# Altium PCB Blaster.PcbDoc
Units mm, origin at the board's own origin, x right, y up, seen from the top; angles counter-clockwise.
Board outline 45.95 x 23.95 mm, 2 copper layers (Top Layer, Bottom Layer); 22 components, 33 nets, 129 pads, 49 vias.
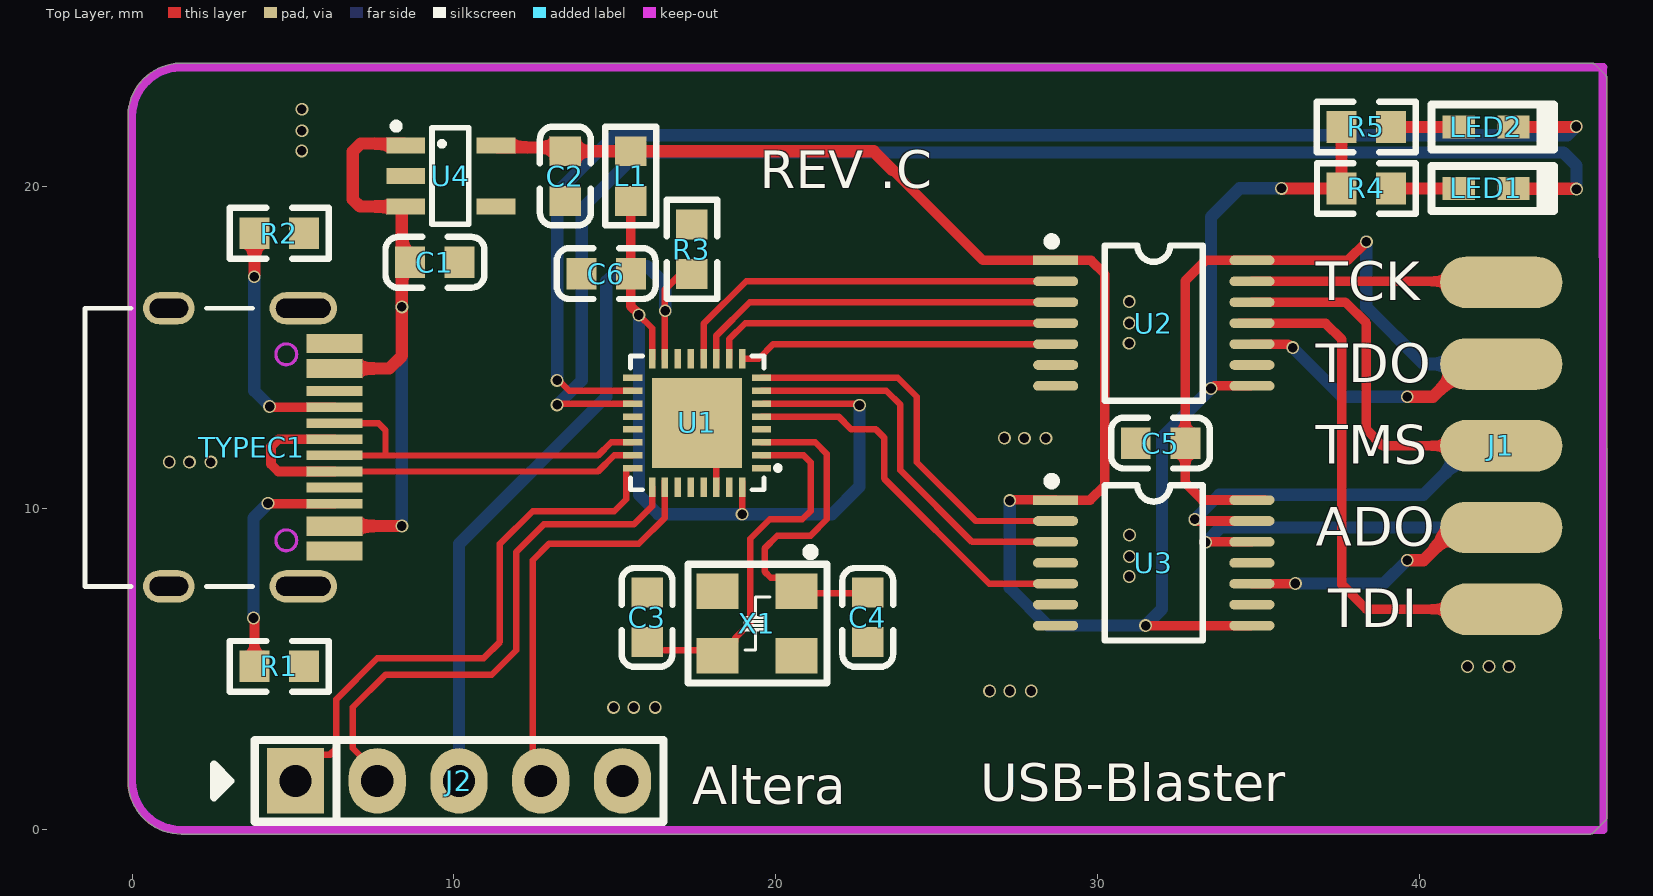
[diagram p0: Top Layer view]
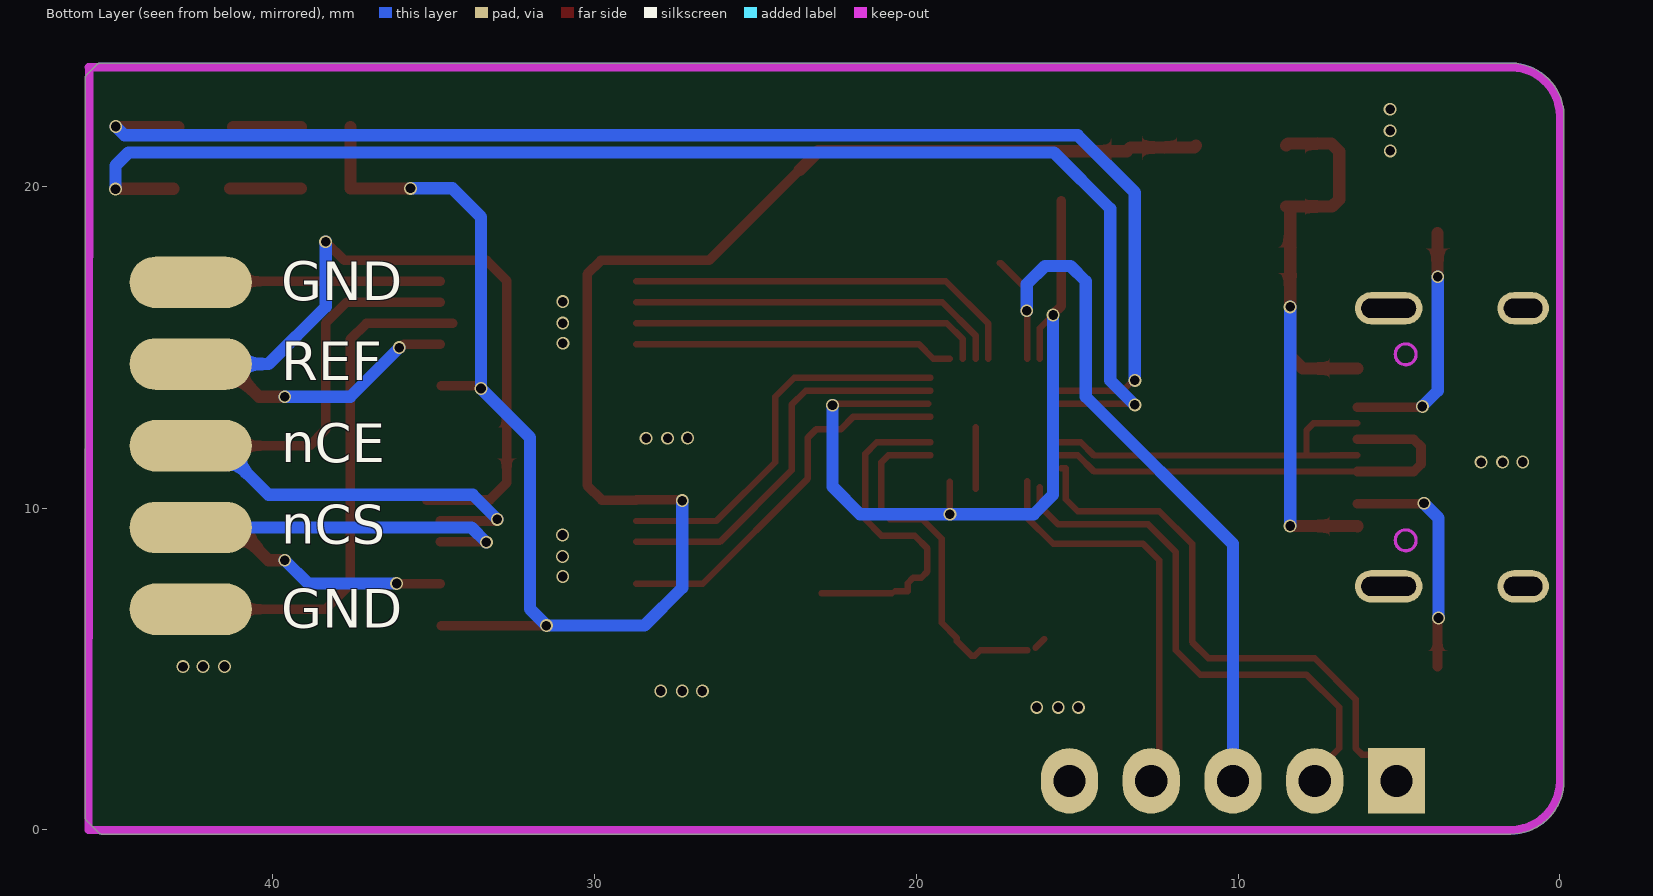
[diagram p1: Bottom Layer view, seen from below]
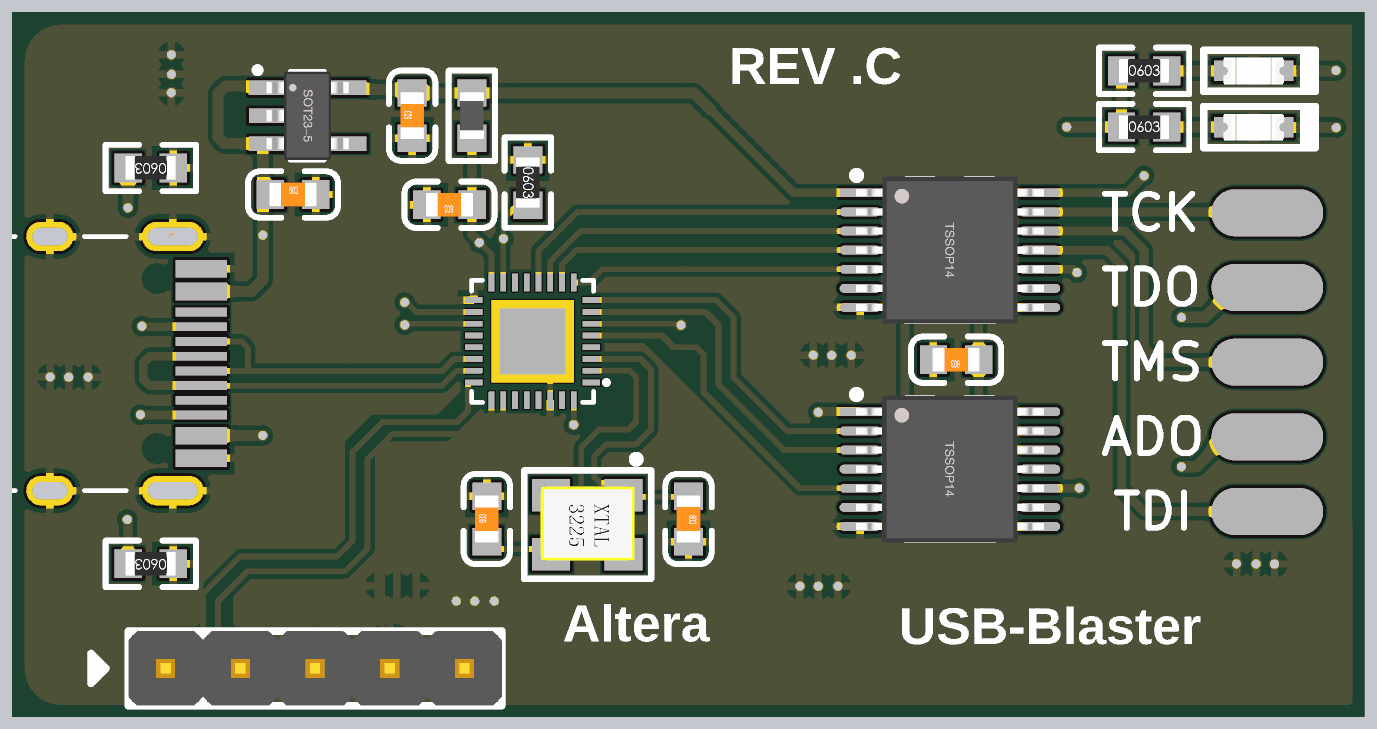
[diagram p2: 3D render of the assembled board from above, using the file's embedded part models]

## Layer stack, top to bottom
Top Solder: solder mask 0.0102, Solder Resist, Dk 3.5
Top Layer: signal copper 0.0356
Dielectric 1: dielectric 0.32, FR-4, Dk 4.8
Bottom Layer: signal copper 0.0356
Bottom Solder: solder mask 0.0102, Solder Resist, Dk 3.5

## Board outline
-0.127,1.524 -0.127,22.303 cw(c0,22.303) -0.118,22.351 cw(c1.524,22.176) 1.349,23.818 cw(c1.397,23.7) 1.397,23.827 45.368,23.827 cw(c45.368,23.7) 45.458,23.79 45.79,23.458 45.79,23.459 cw(c45.7,23.368) 45.827,23.368 45.827,0.381 cw(c45.7,0.381) 45.79,0.29 45.79,0.291 45.409,-0.09 45.41,-0.09 cw(c45.319,0) 45.319,-0.127 1.524,-0.127 cw(c1.524,1.524)

## Design rules (kind name [scope] priority, off if disabled: settings)
Clearance [All] p1: gap=0.15 ignorepadtopadclearanceinfootprint=FALSE
PolygonConnect [All] p1: connectstyle=Relief reliefconductorwidth=0.254 reliefentries=4 polygonreliefangle="90 Angle" airgapwidth=0.254
RoutingVias [All] p1: holewidth=0.711 width=1.27 viastyle="Through Hole" minholewidth=0.3 minwidth=0.4 maxholewidth=0.711 maxwidth=1.27
SolderMaskExpansion [All] p1: expansion=0.102 istentingtop=FALSE
SupplyNets "Schematic Supply Nets_3" [InNet('+5')] p1: voltage=0.000
SupplyNets "Schematic Supply Nets_2" [InNet('+3.3')] p2: voltage=0.000
SupplyNets "Schematic Supply Nets_1" [InNet('GND')] p3: voltage=0.000
SupplyNets "Schematic Supply Nets" [InNet('VREF')] p4: voltage=0.000
Width [All] p1: maxlimit=0.762 minlimit=0.2 preferedwidth=0.381
30 further rules are at their usual default settings.

## Components (designator, comment, footprint, x,y, rotation, side; value= is the part's Value field where it differs from the comment)
C1 "1uF" LC-0603_C 9.41,17.64 r0 top
C2 "1uF" LC-0603_C 13.462,20.32 r90 top
C3 "20pF" LC-0603_C 16.002,6.604 r90 top
C4 "20pF" LC-0603_C 22.86,6.604 r270 top
C5 "1uF" LC-0603_C 31.959,12.021 r180 top
C6 "1uF" LC-0603_C 14.731,17.29 r180 top
J1 "HDR2x5" HDR-M-2.54_2X5_SMT 42.545,11.938 r0 top locked
J2 "HDR1x5" PIN-5-2.54-1.0 10.16,1.524 r0 top
L1 "BLM21PG121SN1D" LC-0603_L 15.494,20.32 r270 top
LED1 "LED-A" LED-0603 42.076,19.933 r0 top
LED2 "LED-B" LED-0603 42.076,21.844 r0 top
R1 "5.1K" LC-0603_R 4.572,5.08 r180 top
R2 "5.1K" LC-0603_R 4.572,18.542 r180 top
R3 "5.1K" LC-0603_R 17.397,18.045 r270 top
R4 "1K" LC-0603_R 38.355,19.933 r0 top
R5 "1K" LC-0603_R 38.354,21.844 r0 top
TYPEC1 "TYPEC16P-SMD" TYPE-C-Receptacle-2.0 -1.459,11.89 r270 top locked
U1 "AGRV2KQ32" QFN-32_L4.0-W4.0-P0.40-BL-EP2.7 17.558,12.646 r90 top
U2 "TXU0304" TSSOP14_N 31.75,15.748 r0 top
U3 "TXU0304" TSSOP14_N 31.748,8.3 r0 top
U4 "LP5907" SOT23-5N 9.906,20.32 r270 top
X1 "XTAL-3225" XTAL-3225 20.574,7.366 r270 top

## Footprints (in the part's own frame and the unit in brackets; to place one, negate y for a bottom-side part, rotate by r counter-clockwise, add the part's x,y. Pads: shape width x height; smd on the part's side, far side on the other; paste and mask are expansions set on the pad)
HDR-M-2.54_2X5_SMT [mm] "Pin Header"
  oval 3.8x1.6 smd: 1(0,5.08) 3(0,2.54) 5(0,0) 7(0,-2.54) 9(0,-5.08)
  oval 3.8x1.6 smd far side: 2(0,5.08) 4(0,2.54) 6(0,0) 8(0,-2.54) 10(0,-5.08)
LC-0603_C [mm]
  rect 0.93x0.98 smd: 1(-0.77,0) 2(0.77,0)
  silkscreen extent -1.53,-0.79 1.54,0.79, body extent -0.8,-0.4 0.8,0.4, height 0.3
LC-0603_L [mm]
  rect 0.93x0.98 smd: 1(-0.77,0) 2(0.77,0)
  silkscreen extent -1.53,-0.79 1.54,0.79, body extent -0.82,-0.41 0.83,0.41, height 0.46
LC-0603_R [mm]
  rect 0.93x0.98 smd: 1(-0.77,0) 2(0.77,0)
  silkscreen extent -1.53,-0.79 1.54,0.79, body extent -0.85,-0.4 0.85,0.4, height 0.56
LED-0603 [mm] "LED, SMD, 0603"
  rect 1x0.7 smd: 1(-0.85,0) 2(0.85,0)
  silkscreen extent -1.7,-0.7 2.1,0.7, body extent -1.03,-0.46 1.03,0.45, height 0.85
PIN-5-2.54-1.0 [mil] "Pin Header"
  rect 70x80 hole 39.37: 1(-200,0)
  oval 70x80 hole 39.37: 2(-100,0) 3(0,0) 4(100,0) 5(200,0)
  silkscreen extent -300,-50 250,50, body extent -250,-50 250,50, height 398
QFN-32_L4.0-W4.0-P0.40-BL-EP2.7 [mm]
  rect 0.2x0.6 smd paste-100 mask+0.051: 1(-1.4,-2) 2(-1,-2) 3(-0.6,-2) 4(-0.2,-2) 5(0.2,-2) 6(0.6,-2) 7(1,-2) 8(1.4,-2) 17(1.4,2) 18(1,2) 19(0.6,2) 20(0.2,2) 21(-0.2,2) 22(-0.6,2) 23(-1,2) 24(-1.4,2)
  rect 0.6x0.2 smd paste-100 mask+0.051: 9(2,-1.4) 10(2,-1) 11(2,-0.6) 12(2,-0.2) 13(2,0.2) 14(2,0.6) 15(2,1) 16(2,1.4) 25(-2,1.4) 26(-2,1) 27(-2,0.6) 28(-2,0.2) 29(-2,-0.2) 30(-2,-0.6) 31(-2,-1) 32(-2,-1.4)
  rect 2.8x2.8 smd paste-100 mask+0.051: 33(0,0)
  silkscreen extent -2.08,-2.58 2.08,2.08
SOT23-5N [mm] "3x1.6x1.1mm(长宽高)"
  rect 0.5x1.2 smd: 1(-0.95,-1.4) 2(0,-1.4) 3(0.95,-1.4) 4(0.95,1.4) 5(-0.95,1.4)
  silkscreen extent -1.63,-1.78 1.5,0.56, body extent -1.5,-1.4 1.5,1.4, height 1.15
TSSOP14_N [mm] "5*6.4*1mm（长宽高）"
  rect 1.4x0.3 smd: 1(-3.05,1.95)
  oval 1.4x0.3 smd: 2(-3.05,1.3) 3(-3.05,0.65) 4(-3.05,0) 5(-3.05,-0.65) 6(-3.05,-1.3) 7(-3.05,-1.95) 8(3.05,-1.95) 9(3.05,-1.3) 10(3.05,-0.65) 11(3.05,0) 12(3.05,0.65) 13(3.05,1.3) 14(3.05,1.95)
  silkscreen extent -3.3,-2.41 1.52,2.67, body extent -3.2,-2.5 3.2,2.5, height 1.03
TYPE-C-Receptacle-2.0 [mm]
  oval 1x2.1 hole 0.6 slot 1.7 at 90 deg: 0(-4.32,6.78) 0(4.32,6.78)
  oval 1x1.6 hole 0.6 slot 1.2 at 90 deg: 0(-4.32,2.6) 0(4.32,2.6)
  rect 0.6x1.75 smd: A1(-3.225,7.75) A4(-2.45,7.75) B1(3.225,7.75) B4(2.45,7.75)
  rect 0.3x1.75 smd: A5(-1.25,7.75) A6(-0.25,7.75) A7(0.25,7.75) A8(1.25,7.75) B5(1.75,7.75) B6(0.75,7.75) B7(-0.75,7.75) B8(-1.75,7.75)
  Keep-Out Layer circle w0.1: c-2.89,6.25 r0.325
  Keep-Out Layer circle w0.1: c2.89,6.25 r0.325
  silkscreen extent -4.32,0 4.32,5.2
XTAL-3225 [mm]
  rect 1.1x1.3 smd: 1(-0.051,0.076) 2(-0.051,-2.388) 3(1.956,-2.388) 4(1.956,0.076)
  silkscreen extent -1.4,-3.3 2.79,1.02, body extent -0.34,-2.74 2.16,0.46, height 0.8

## Part data
C1 C2 C3 C4 C5 C6: library part CAP, "Capacitor"
J1 J2: "Connector"
L1: library part INDUCTANCE, "Inductance"
LED1: library part LED
LED2: library part LED, "LED"
R1 R4 R5: library part RES, "Resistor"
R2 R3: library part RES
U4: library part LP5907MFX-3.3/NOPB, Symbol=LP5907MFX-3.3/NOPB
X1: library part XTAL-4P, Symbol=XL2EL89CSI-KPIYLC-8M
U1: Symbol=AGRV2KQ32
U2 U3: Symbol=GTXU0304TD

## Via types
v1: diameter 0.4, hole 0.3, Top Layer to Bottom Layer, tented both sides, 49 vias

## Nets (pads, with @x,y where several pads share a name; then routed paths per layer and width w, separated by ;. In a path a pad name is that pad's centre, name@x,y a point inside that pad or via, vN(x,y) a via of type N, cw(c..) or ccw(c..) an arc to the next point about the centre after c; other vN are vias at no path point)
+3.3: C2.2 L1.1 R4.1 R5.1 U2.1 U2.8 U3.1 U3.8 U4.5 | length 62.1
  Top Layer w0.3: 23.622,20.511 26.435,17.698 U2.1 29.8,17.698 30.226,17.272 30.226,10.71 29.766,10.25 U3.1 ; v1@27.266,10.255 U3.1@28.703,10.255 ; v1(31.496,6.35) U3.8@34.757,6.35 ; v1(33.528,13.716) 33.555,13.716 33.637,13.798 U2.8@34.76,13.798
  Top Layer w0.381: U4.5 11.365,21.211 13.341,21.211 C2.2 15.232,21.09 23.043,21.09 23.622,20.511 ; v1@35.759,19.922 35.77,19.933 R4.1 ; R4.1@37.585,19.934 R5.1
  Bottom Layer w0.381: v1(27.273,10.233) 27.273,7.525 28.448,6.35 v1(31.496,6.35) 31.496,6.355 32.004,6.863 32.004,12.192 v1(33.528,13.716) 33.528,19.05 34.415,19.937 v1(35.719,19.937)
+5: C1.1 TYPEC1.A4 TYPEC1.B4 U4.1 U4.3 | length 20.8
  Top Layer w0.381: TYPEC1.B4 6.293,9.442 8.379,9.442 v1(8.381,9.445) ; TYPEC1.A4 7.99,14.34 8.382,14.732 8.382,19.31 U4.3@8.441,19.37 ; U4.3 U4.3@8.441,19.37 ; U4.1 8.447,21.329 7.105,21.329 6.858,21.082 6.858,19.593 7.081,19.37 U4.3@8.441,19.37
  Bottom Layer w0.381: v1(8.381,9.445) v1(8.382,16.256)
ASDO: J1.7 U3.10 | length 8.5
  Top Layer w0.3: U3.10 36.144,7.65 v1(36.149,7.656)
  Top Layer w0.381: v1(39.624,8.382) 40.132,8.382 40.962,9.212 42.359,9.212 J1.7
  Bottom Layer w0.381: v1(36.149,7.656) 38.898,7.656 v1(39.624,8.382)
BOOT0: J2.3 R3.2 U1.15 | length 22.9
  Top Layer w0.2: U1.15 16.558,16.795 17.38,17.617 R3.2@17.405,17.617
  Bottom Layer w0.381: J2.3@10.16,2.453 10.16,8.89 14.732,13.462 14.732,17.049 15.209,17.526 16.002,17.526 16.566,16.962 v1(16.566,16.135)
DN: TYPEC1.A7 TYPEC1.B7 U1.22 | length 11.9
  Top Layer w0.2: TYPEC1.B7 7.658,12.64 7.874,12.424 7.874,11.635 ; TYPEC1.A7@6.296,11.64 7.104,11.64 7.108,11.635 7.874,11.635 ; U1.22 14.888,12.046 14.478,11.635 7.874,11.635
DP: TYPEC1.A6 TYPEC1.B6 U1.23 | length 14.2
  Top Layer w0.2: TYPEC1.B6@6.293,11.138 14.475,11.138 14.983,11.646 U1.23
  Top Layer w0.3: TYPEC1.B6 4.541,11.14 4.318,11.363 4.318,11.917 4.541,12.14 TYPEC1.A6
GND: C1.2 C2.1 C3.2 C4.2 C5.2 C6.2 J1.2 J1.10 J2.5 R1.1 R2.1 R3.1 TYPEC1.0 TYPEC1.A1 TYPEC1.B1 U1.17 U1.30 U1.33 U2.7 U3.7 U4.2 | length 1.9
  Top Layer w0.2: U1.30@18.158,10.597 U1.33@18.158,12.514
  other v1: 14.964,3.81 15.588,3.81 16.256,3.81 26.648,4.318 27.272,4.318 27.94,4.318 41.496,5.08 42.164,5.08 42.788,5.075 30.988,7.874 30.993,8.498 30.993,9.166 1.154,11.435 1.778,11.43 2.446,11.43 27.104,12.178 27.728,12.172 28.396,12.172 30.983,15.124 30.988,15.748 30.988,16.416 5.271,21.102 5.276,21.726 5.276,22.394
IO-ASDO: U1.5 U3.5 | length 12
  Top Layer w0.2: U1.5 21.952,12.846 22.352,12.446 23.114,12.446 23.368,12.192 23.368,10.922 26.64,7.65 U3.5
IO-NCE: U1.8 U3.2 | length 12.2
  Top Layer w0.2: U1.8 20.675,14.046 20.678,14.049 23.797,14.049 24.384,13.462 24.384,11.43 26.214,9.6 U3.2
IO-NCS: U1.7 U3.3 | length 12.3
  Top Layer w0.2: U1.7 20.831,13.646 23.438,13.646 23.876,13.208 23.876,11.176 26.102,8.95 U3.3
IO-TCK: U1.12 U2.2 | length 12.6
  Top Layer w0.2: U1.12 17.758,15.726 19.08,17.048 U2.2
IO-TDI: U1.10 U2.4 | length 11
  Top Layer w0.2: U1.10 18.558,15.256 19.05,15.748 U2.4
IO-TDO: U1.9 U2.5 | length 9.9
  Top Layer w0.2: U1.9 19.472,14.646 19.924,15.098 U2.5
IO-TMS: U1.11 U2.3 | length 11.7
  Top Layer w0.2: U1.11 18.158,15.364 19.192,16.398 U2.3
JTCK: J2.2 U1.25 | length 16.6
  Top Layer w0.2: J2.2@7.62,1.778 6.858,2.54 6.858,3.81 7.874,4.826 11.176,4.826 11.938,5.588 11.938,8.636 12.795,9.493 15.589,9.493 16.158,10.062 U1.25
JTMS: J2.1 U1.24 | length 17.7
  Top Layer w0.2: J2.1 5.08,1.553 5.869,2.342 6.152,2.342 6.35,2.54 6.35,4.064 7.62,5.334 10.922,5.334 11.43,5.842 11.43,8.89 12.446,9.906 14.986,9.906 15.358,10.278 15.358,11.246 U1.24@15.494,11.246
LED1: LED1.2 U1.19 | length 43.1
  Top Layer w0.2: v1(13.208,13.208) 13.246,13.246 U1.19
  Top Layer w0.381: LED1.2@43.082,19.922 44.871,19.922 44.878,19.914 v1(44.883,19.914)
  Bottom Layer w0.381: v1(13.208,13.208) 13.21,13.208 13.97,13.968 13.97,19.304 15.718,21.052 44.48,21.052 44.883,20.649 v1(44.883,19.914)
LED2: LED2.2 U1.18 | length 42.8
  Top Layer w0.2: v1(13.208,13.97) 13.262,13.97 13.586,13.646 U1.18
  Top Layer w0.381: LED2.2 44.857,21.844 44.872,21.859 v1(44.877,21.859)
  Bottom Layer w0.381: v1(13.208,13.97) 13.208,19.812 14.986,21.59 44.608,21.59 v1(44.877,21.859)
MCU3V3: C6.1 L1.2 U1.6 U1.16 U1.32 | length 24.8
  Top Layer w0.2: v1(15.748,16.002) 16.159,15.591 U1.16@16.159,14.905 ; U1.16 U1.16@16.158,14.904 ; v1(18.955,9.812) U1.32@18.956,10.824 ; U1.6@19.634,13.246 22.502,13.246 22.552,13.196 v1(22.606,13.196)
  Top Layer w0.3: L1.2 15.494,16.283 15.748,16.029 v1(15.748,16.002)
  Bottom Layer w0.381: v1(15.748,16.002) 15.748,10.414 16.35,9.812 v1(18.955,9.812) 21.75,9.812 22.606,10.668 v1(22.606,13.196)
nCE: J1.6 U3.13 | length 12.3
  Top Layer w0.3: v1(33.02,9.652) 33.047,9.652 33.099,9.6 U3.13
  Bottom Layer w0.381: v1(33.02,9.652) 33.782,10.414 40.132,10.414 41.656,11.938 J1.6
nCS: J1.8 U3.12 | length 10.8
  Top Layer w0.3: v1@33.361,8.95 U3.12
  Bottom Layer w0.381: v1(33.361,8.938) 33.821,9.398 J1.8
NetC3_1: C3.1 U1.2 X1.3 | length 11.6
  Top Layer w0.2: C3.1@16.021,5.933 C3.1@16.296,5.658 ; 16.544,5.588 18.009,5.588 X1.3 18.286,5.41 18.736,5.86 18.736,5.96 19.211,6.435 19.211,9.051 19.812,9.652 20.828,9.652 21.082,9.906 21.082,11.43 20.866,11.646 U1.2
NetC4_1: C4.1 U1.3 X1.1 | length 10.8
  Top Layer w0.2: U1.3 21.228,12.046 21.59,11.684 21.59,9.652 21.082,9.144 20.052,9.144 19.654,8.746 19.654,8.032 19.848,7.838 20.1,7.838 20.269,7.669 20.269,7.417 X1.1 ; X1.1@20.759,7.36 C4.1@22.945,7.36
NetLED1_1: LED1.1 R4.2 | length 2.2
  Top Layer w0.381: R4.2 LED1.1@41.315,19.933
NetLED2_1: LED2.1 R5.2 | length 2.1
  Top Layer w0.381: R5.2 LED2.1
NetR1_2: R1.2 TYPEC1.B5 | length 7.3
  Top Layer w0.3: R1.2 v1@3.802,6.604 ; v1@4.237,10.136 5.474,10.136 5.478,10.14 TYPEC1.B5@6.287,10.14
  Bottom Layer w0.381: v1(3.773,6.587) 3.773,9.697 4.222,10.146 v1(4.222,10.151)
NetR2_2: R2.2 TYPEC1.A5 | length 7.5
  Top Layer w0.3: v1(4.275,13.16) 4.302,13.16 4.322,13.14 TYPEC1.A5
  Top Layer w0.381: v1@3.802,17.28 R2.2
  Bottom Layer w0.381: v1(3.794,17.191) 3.794,13.646 4.275,13.165 v1(4.275,13.16)
TCK: J1.1 U2.13 | length 7.8
  Top Layer w0.3: U2.13 42.515,17.048 J1.1
TDI: J1.9 U2.11 | length 16.3
  Top Layer w0.3: U2.11@34.41,15.742 37.09,15.742 37.592,15.24 37.592,7.62 38.354,6.858 J1.9
TDO: J1.3 U2.10 | length 8.8
  Top Layer w0.3: U2.10 35.929,15.098 36.041,14.986 v1(36.068,14.986)
  Top Layer w0.381: v1(39.624,13.462) 40.429,13.462 41.445,14.478 J1.3
  Bottom Layer w0.381: v1(36.068,14.986) 37.592,13.462 v1(39.624,13.462)
TMS: J1.5 U2.12 | length 11.5
  Top Layer w0.3: U2.12 37.704,16.398 38.354,15.748 38.354,12.446 38.862,11.938 J1.5
UART_TX: J2.4 U1.26 | length 12.8
  Top Layer w0.2: J2.4 12.446,1.778 12.446,8.382 12.954,8.89 15.748,8.89 16.558,9.7 U1.26@16.558,10.84
VREF: C5.1 J1.4 U2.14 U3.14 | length 22.1
  Top Layer w0.3: U3.14@35.209,10.253 33.26,10.253 32.729,10.784 C5.1 32.729,17.071 33.356,17.698 U2.14 37.776,17.698 v1(38.354,18.276)
  Bottom Layer w0.381: v1@38.354,18.288 38.354,16.256 40.132,14.478 J1.4
pads on no net: TYPEC1.A8 TYPEC1.B8 U1.1 U1.4 U1.13 U1.14 U1.20 U1.21 U1.27 U1.28 U1.29 U1.31 U2.6 U2.9 U3.4 U3.6 U3.9 U3.11 U4.4 X1.2 X1.4

## Polygon pours and split planes (outlines as drawn)
GND on Top Layer "NONET_L01_P001" (solid, remove dead copper, shelved, pour order 1): -0.127,1.524 -0.127,22.303 cw(c0,22.303) -0.118,22.351 cw(c1.524,22.176) 1.349,23.818 cw(c1.397,23.7) 1.397,23.827 45.368,23.827 cw(c45.368,23.7) 45.458,23.79 45.79,23.458 45.79,23.459 cw(c45.7,23.368) 45.827,23.368 45.827,0.381 cw(c45.7,0.381) 45.79,0.29 45.79,0.291 45.409,-0.09 45.41,-0.09 cw(c45.319,0) 45.319,-0.127 1.524,-0.127 cw(c1.524,1.524)
GND on Bottom Layer "NONET_L02_P000" (solid, remove dead copper, shelved, pour order 0): -0.127,1.524 -0.127,22.303 cw(c0,22.303) -0.118,22.351 cw(c1.524,22.176) 1.349,23.818 cw(c1.397,23.7) 1.397,23.827 45.368,23.827 cw(c45.368,23.7) 45.458,23.79 45.79,23.458 45.79,23.459 cw(c45.7,23.368) 45.827,23.368 45.827,0.381 cw(c45.7,0.381) 45.79,0.29 45.79,0.291 45.409,-0.09 45.41,-0.09 cw(c45.319,0) 45.319,-0.127 1.524,-0.127 cw(c1.524,1.524)

## Keep-outs
Keep-Out Layer:
  lines w0.254: 0,22.176 cw(c1.524,22.176) 1.524,23.7 ; 0,22.303 0,1.524 ; 1.397,23.7 45.72,23.7 ; 45.7,23.7 45.72,0 1.524,0 ; 0,1.524 ccw(c1.524,1.524) 1.524,0 ; 0,1.524 ccw(c1.524,1.524) 1.524,0

## Silkscreen, mask and mechanical layers (free items; w line width, h text height)
Top Overlay:
  text "REV .C" at 19.506,19.551 h2
  text "TCK" at 36.776,16.456 h1.2
  text "TDO" at 36.776,13.916 h1.2
  text "TMS" at 36.776,11.376 h1.2
  text "ADO" at 36.776,8.836 h1.2
  text "TDI" at 37.176,6.296 h1.2
  text "USB-Blaster" at 26.364,0.501 h2
  text "Altera" at 17.408,0.409 h2
Bottom Overlay:
  text "GND" at 39.732,16.456 h1.2
  text "REF" at 39.732,13.97 h1.2
  text "nCE" at 39.732,11.43 h1.2
  text "nCS" at 39.732,8.89 h1.2
  text "GND" at 39.732,6.287 h1.2